# EAGLE board motorstyrning (EAGLE 6.5.0)
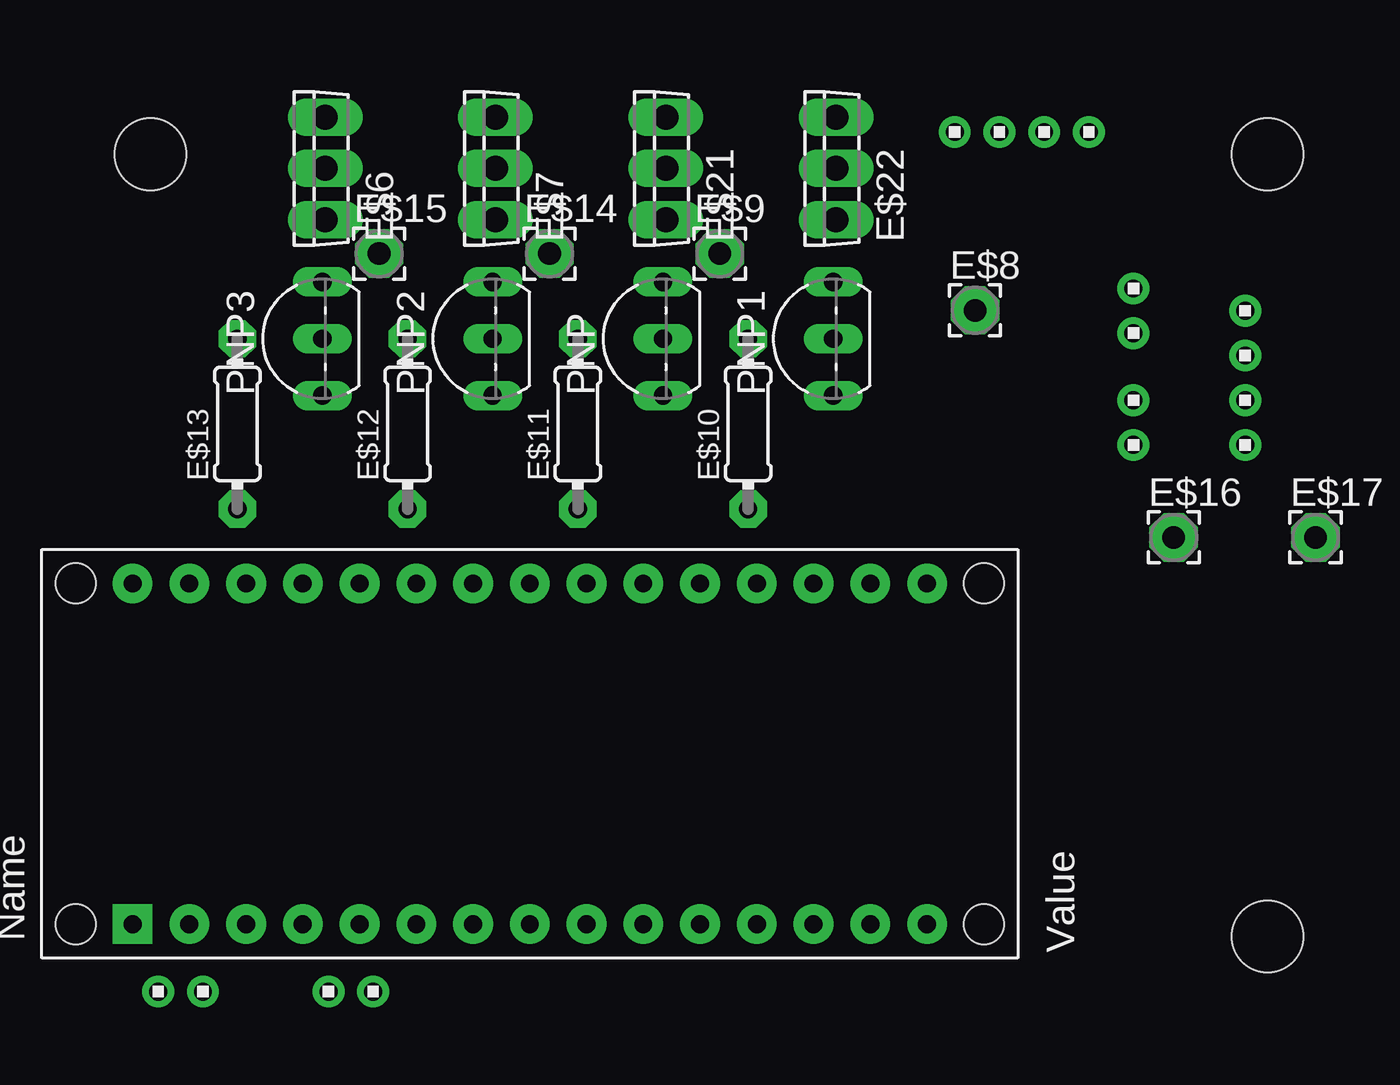
[diagram p0: board, top side]
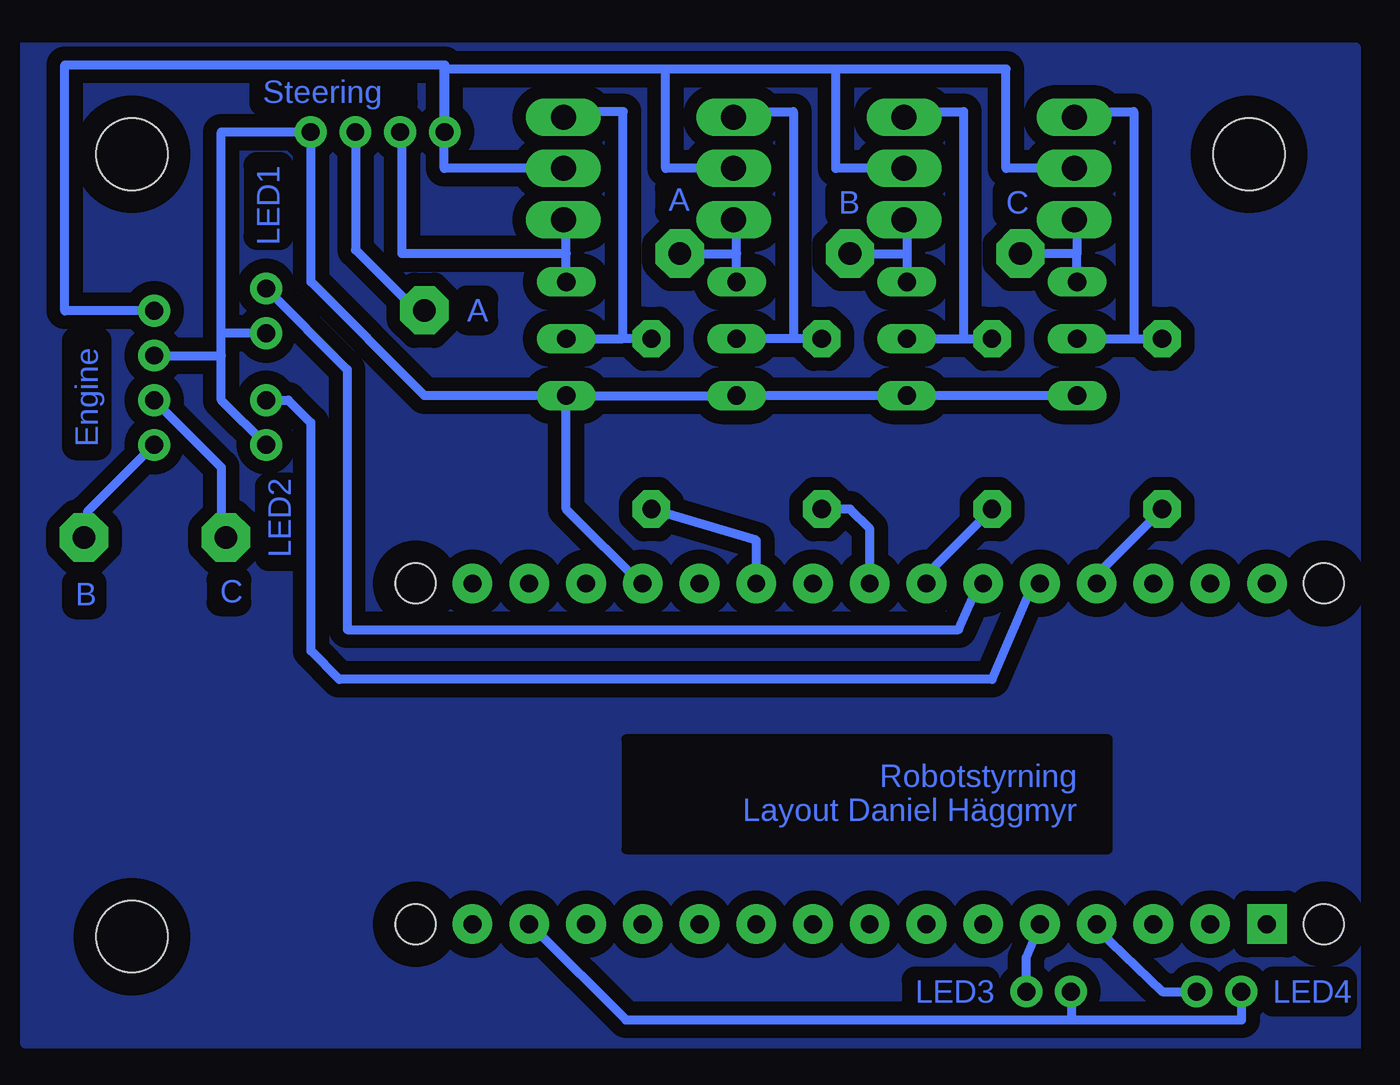
[diagram p1: board, bottom side, seen from below]

No outline drawn. Coordinates in mm, seen from the top.
Copper layers (1*16): Top 0.035mm / dielectric 1.5mm / Bottom 0.035mm
Design rules "default": minimum track width 10mil, minimum drill 24mil, track to track 8mil, track to pad 8mil, pad to pad 8mil, via to via 8mil, smd to smd 8mil, copper to edge 40mil, drill to drill 8mil, minimum pad ring 10mil, minimum via ring 8mil, stop-mask expansion 4mil, vias tented up to drill 0mil, thermal gap 10mil
Holes 3.2 mm at 55,5 55,40 5,40

## Footprints (pad centres in the part's own frame; a part is rotated, then mirrored left to right if it is on the bottom)
PDIP-32 = drill 0.8 pad 1.778: 3V3 15.24,-35.56; +5V 15.24,-10.16; A0 15.24,-12.7; A1 15.24,-15.24; A2 15.24,-17.78; A3 15.24,-20.32; A4 15.24,-22.86; A5 15.24,-25.4; A6 15.24,-27.94; A7 15.24,-30.48; AREF 15.24,-33.02; D0/RX 0,-5.08; D2 0,-12.7; D3 0,-15.24; D4 0,-17.78; D5 0,-20.32; D6 0,-22.86; D7 0,-25.4; D8 0,-27.94; D9 0,-30.48; D10 0,-33.02; D11 0,-35.56; D12 0,-38.1; D13 15.24,-38.1; GND 0,-10.16; GND1 15.24,-5.08; RESET 0,-7.62; RESET1 15.24,-7.62; VIN 15.24,-2.54 | drill 0.8 pad 1.778 square: D1/TX 0,-2.54 | hole 1.778: 0,0; 0,-40.64; 15.24,-40.64; 15.24,0
1X4 = drill 0.8 pad 1.422: 1 -3,0; 2 -1,0; 3 1,0; 4 3,0
1X2 = drill 0.8 pad 1.422: 1 -1,0; 2 1,0
C369-1 = drill 1.118 long: D 0,-1.397; G -2.286,-1.397; S 2.286,-1.397
2,15/1,0 = drill 1.016 pad 2.159 octagon: 1 0,0
0204/7 = drill 0.813 pad 1.676 octagon: 1 -3.81,0; 2 3.81,0
TO92-CBE = drill 0.813 long: B 0,0; C 2.54,0; E -2.54,0

## Placement (x,y rotation side)
E$1  [PDIP-32]  1.66,5.56 90 top
E$3  [1X4]  44,41 180 top
E$4  [1X2]  6.35,2.54 180 top
E$5  [1X2]  13.97,2.54 180 top
E$6  [C369-1]  11.43,39.37 90 top
E$7  [C369-1]  19.05,39.37 90 top
E$8  [2,15/1,0]  41.91,33.02 0 top
E$9  [2,15/1,0]  30.48,35.56 0 top
E$10  [0204/7]  31.75,27.94 90 top
E$11  [0204/7]  24.13,27.94 90 top
E$12  [0204/7]  16.51,27.94 90 top
E$13  [0204/7]  8.89,27.94 90 top
E$14  [2,15/1,0]  22.86,35.56 0 top
E$15  [2,15/1,0]  15.24,35.56 0 top
E$16  [2,15/1,0]  50.8,22.86 0 top
E$17  [2,15/1,0]  57.15,22.86 0 top
E$18  [1X2]  49,33 90 top
E$19  [1X2]  49,28 90 top
E$20  [1X4]  54,30 90 top
E$21  [C369-1]  26.67,39.37 90 top
E$22  [C369-1]  34.29,39.37 90 top
PNP  [TO92-CBE]  27.94,31.75 90 top
PNP1  [TO92-CBE]  35.56,31.75 90 top
PNP2  [TO92-CBE]  20.32,31.75 90 top
PNP3  [TO92-CBE]  12.7,31.75 90 top

## Library data of the parts
E$1 = jet-lib
E$3-E$5 E$18-E$20 = headers(2mm)
E$6 E$7 E$21 E$22 = transistor-small-signal
E$8 E$9 E$14-E$17 = wirepad
E$10-E$13 = adafruit
PNP PNP1-PNP3 = transistor-pnp

## Nets
S$4: E$11.2 PNP.B
S$6: E$10.2 PNP1.B
S$7: E$3.2
S$8: E$15.1 PNP3.C
S$9: E$14.1 PNP2.C
S$10: E$12.2 PNP2.B
S$11: E$13.2 PNP3.B
S$12: E$20.2
S$13: E$10.1
S$14: E$11.1
S$15: E$12.1
S$16: E$13.1
S$17: E$3.1 E$18.1 E$19.1 E$20.3
S$18: E$19.2
S$19: E$20.1
S$23: PNP1.E PNP2.E PNP3.E PNP.E
S$24: E$18.2
S$25: E$3.4 E$20.4
S$26: E$9.1 PNP.C

## Tracks (layer width: path | path; a pad name or v marks a point on that pad's centre or on a via)
S$1
  Bottom 0.406: 35.56,34.29 35.56,35.56 | 35.56,35.56 35.56,36.83 | 35.56,35.56 42.91,35.56 42.91,40.64
S$2
  pour Bottom (isolate 0.61): 0,0 59.75,0 arc90 60,0.25 60,45 0.25,45 arc90 0,44.75
S$3
  Bottom 0.406: 12.7,39.37 15.88,39.37 15.88,43.81 23.5,43.81 | 23.5,43.81 31.11,43.81 | 31.11,43.81 41.02,43.81 41.02,39.37 35.56,39.37 | 20.32,39.37 23.5,39.37 23.5,43.81 | 27.94,39.37 31.11,39.37 31.11,43.81
S$4
  Bottom 0.406: 27.94,41.91 25.4,41.91 25.4,31.75 | 25.4,31.75 PNP.B | E$11.2 25.4,31.75
S$5
  Bottom 0.406: 14.61,20.95 16.51,16.51 45.72,16.51 46.99,17.78 46.99,27.94
S$6
  Bottom 0.406: PNP1.B 33.02,31.75 | 33.02,31.75 33.02,41.91 35.56,41.91 | E$10.2 33.02,31.75
S$7
  Bottom 0.406: E$3.2 45,35.73 42,32.73
S$8
  Bottom 0.406: 12.7,36.83 12.7,35.56 | PNP3.C 12.7,35.56 | 12.7,35.56 E$15.1
S$9
  Bottom 0.406: E$14.1 20.32,35.56 | 20.32,36.83 20.32,35.56 | 20.32,35.56 PNP2.C
S$10
  Bottom 0.406: 20.32,41.91 17.78,41.91 17.78,31.75 | PNP2.B 17.78,31.75 | 17.78,31.75 E$12.2
S$11
  Bottom 0.406: 12.7,41.91 10.16,41.91 10.16,31.75 | PNP3.B 10.16,31.75 | 10.16,31.75 E$13.2
S$12
  Bottom 0.406: E$20.2 51,26 51,23
S$13
  Bottom 0.406: 27.05,20.83 27.05,22.73 E$10.1
S$14
  Bottom 0.406: 21.97,20.83 21.97,23.24 22.86,24.13 E$11.1
S$15
  Bottom 0.406: 19.3,21.34 E$12.1
S$16
  Bottom 0.406: 11.68,21.34 E$13.1
S$17
  Bottom 0.406: E$20.3 51,31 | 51,31 51,32 | 51,32 51,41 E$3.1 | E$18.1 51,32 | E$19.1 51,29 51,31
S$18
  Bottom 0.406: E$19.2 48,29 47,28
S$19
  Bottom 0.406: E$20.1 57,24 57,23
S$20
  Bottom 0.406: 36.96,5.33 32.89,1.27 12.95,1.27 | 12.95,1.27 5.33,1.27 5.33,2.41 | 12.95,2.54 12.95,1.27
S$21
  Bottom 0.406: 12.32,5.84 8.89,2.54 7.62,2.54
S$22
  Bottom 0.406: 14.35,5.59 14.99,4.06 14.99,2.54
S$23
  Bottom 0.406: 32.13,20.7 35.56,24.13 PNP1.E | PNP1.E PNP.E PNP2.E PNP3.E | PNP1.E 41.91,29.21 46.99,34.29 46.99,40.64
S$24
  Bottom 0.406: E$18.2 45.37,30.36 45.37,18.73 18,18.73 17,21 17,20.73
S$25
  Bottom 0.406: E$20.4 58,33 58,44 41,44 E$3.4
S$26
  Bottom 0.406: PNP.C 27.94,35.56 | 27.94,35.56 27.94,36.83 | E$9.1 27.94,35.56
S$27
  cutout Bottom (isolate 0.305): 11.3,9.27 11.3,13.84 32.89,13.84 32.89,8.89 11.3,8.89

## Text on the board
Bottom: Steering | LED1 | C | B | A | A | Engine | LED2 | C | B | Robotstyrning / Layout Daniel Häggmyr | LED4 | LED3